# Altium PCB MIXR User Interface.PcbDoc
Units mm, origin at the board's own origin, x right, y up, seen from the top; angles counter-clockwise.
Board outline 109.43 x 61.1 mm, 2 copper layers (Top Layer, Bottom Layer), stack 1.569 mm thick; 16 components, 9 nets, 50 pads, 70 vias.
Unrouted connection lines stored in the file: 103.
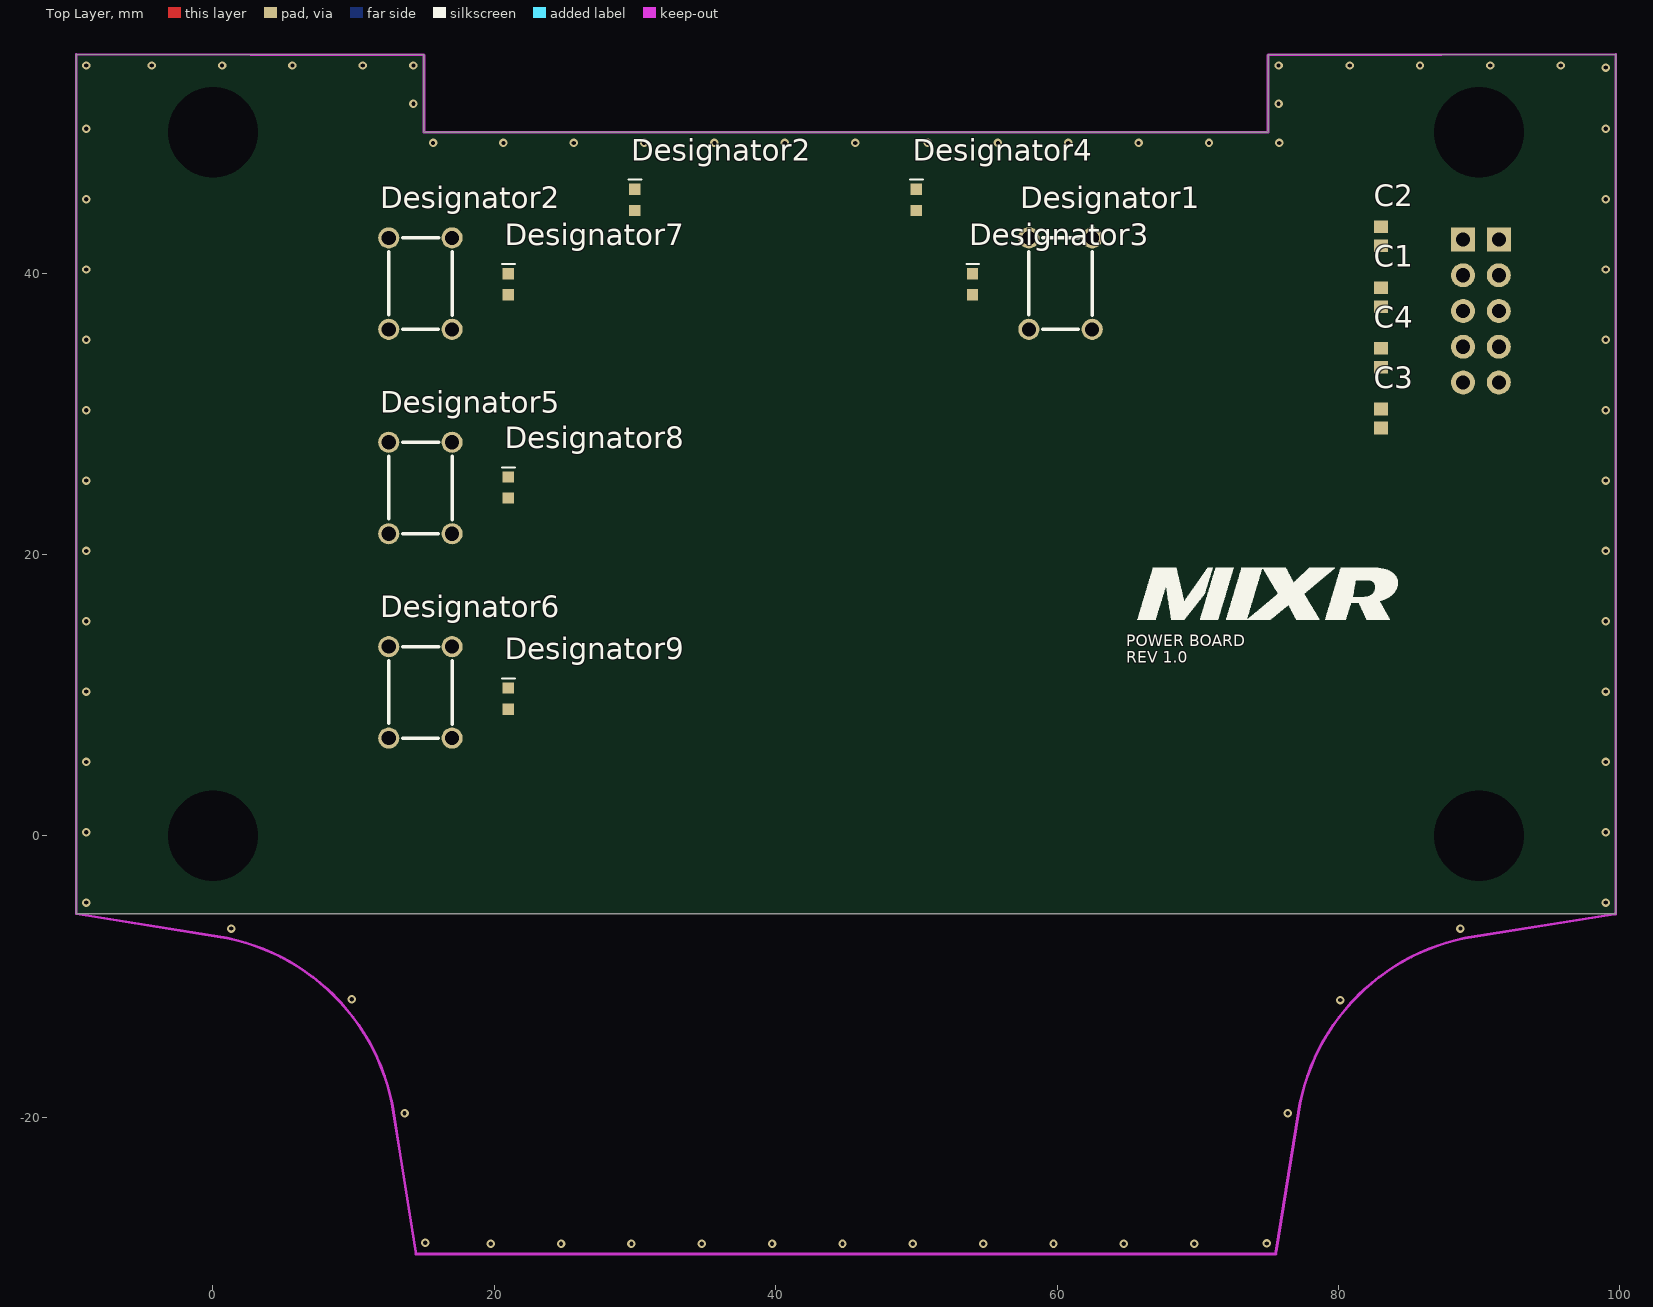
[diagram p0: Top Layer view]
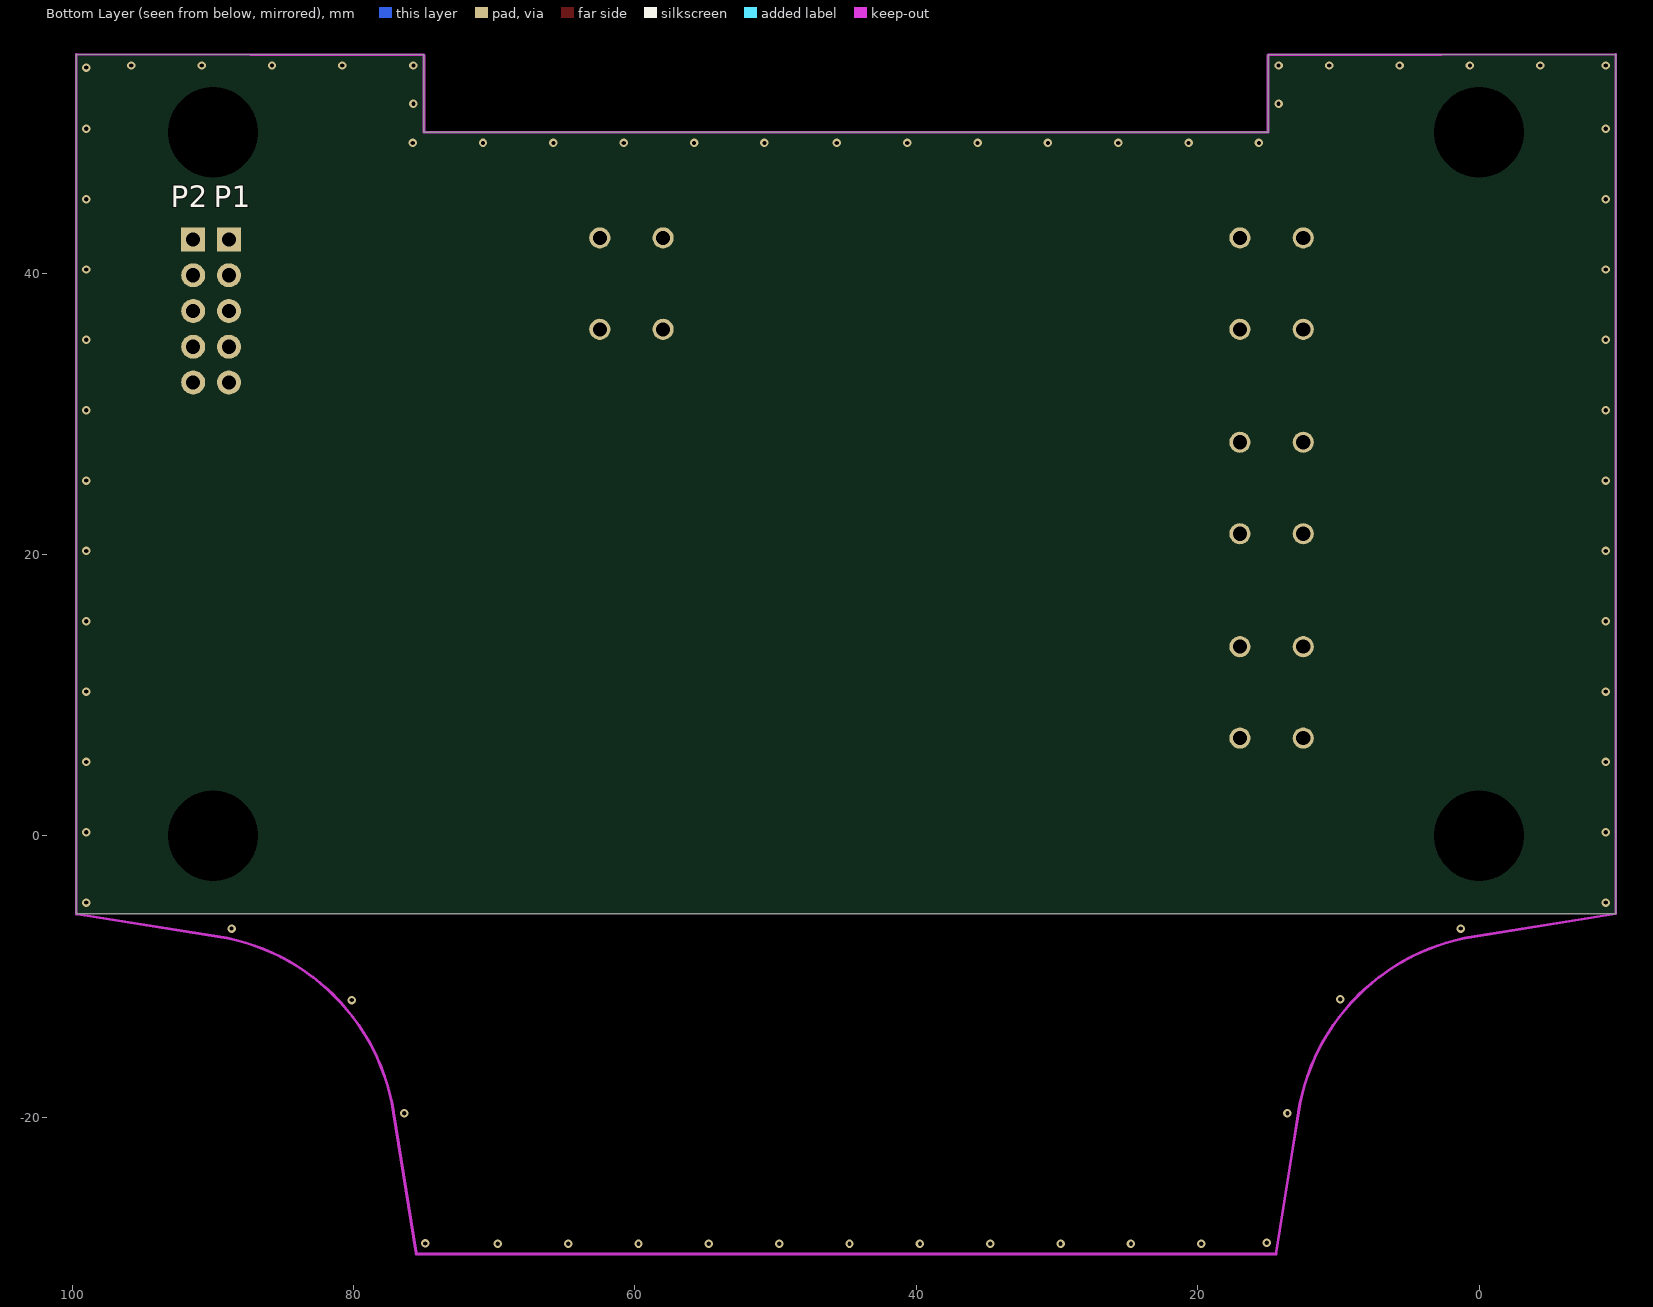
[diagram p1: Bottom Layer view, seen from below]

## Layer stack, top to bottom
Top Solder: solder mask 0.0254, SM-001, Dk 4
Top Layer: signal copper 0.035
Dielectric 1: core 1.4986, Core-043, Dk 4.3
Bottom Layer: signal copper 0.035
Bottom Solder: solder mask 0.0254, SM-001, Dk 4

## Board outline
-9.713,-5.549 -9.713,55.548 15,55.5 15,50 75,50 75,55.504 99.713,55.548 99.713,-5.549

## Design rules (kind name [scope] priority, off if disabled: settings)
BoardOutlineClearance [All] p1: gap=0.406 ignorepadtopadclearanceinfootprint=FALSE
Clearance [All] p1: gap=0.152 ignorepadtopadclearanceinfootprint=TRUE except(0: Arc-Hole Track-Hole SMDPad-Hole THPad-Hole Via-Hole Fill-Hole Poly-Hole Region-Hole Text-Hole)
ComponentClearance ComponentClearance_ControllerBoard [InComponent('P1') vs Identifier = 'Controller_Board'] p1: gap=0 collisioncheckmode=3 verticalgap=0 showdistances=FALSE
ComponentClearance ComponentClearance_Standoffs [Identifier = 'Standoff' vs Identifier = 'Controller_Board'] p2: gap=0 collisioncheckmode=3 verticalgap=0 showdistances=FALSE
ComponentClearance [All] p3: gap=0.254 collisioncheckmode=3 verticalgap=0.254 showdistances=FALSE
DiffPairsRouting USB_90R [All] p1: maxlimit=0.4 minlimit=0.25 mostfreqgap=0.3 toplayer_minwidth=0.2 toplayer_maxwidth=0.35 toplayer_prefwidth=0.25 bottomlayer_minwidth=0.2 bottomlayer_maxwidth=0.35 bottomlayer_prefwidth=0.25 maxuncoupledlength=12.7
Height [All] p1: minheight=0 maxheight=30 prefheight=12.7
HoleSize [All] p1: absolutevalues=TRUE maxlimit=6.3 minlimit=0.3 maxpercent=80.000 minpercent=20.000
MinimumAnnularRing [All] p1: minimumring=0.12
MinimumSolderMaskSliver [All] p1 off: minsoldermaskwidth=0.1
PlaneConnect 0402 [(ObjectKind = 'Component') And ((Footprint = 'CAP 0402') or (Footprint  = 'RES 0402'))] p1: pad.planeconnectstyle=Relief pad.reliefexpansion=0.5 pad.reliefentries=4 pad.reliefconductorwidth=0.2 pad.reliefairgap=0.2 via.planeconnectstyle=Direct via.reliefexpansion=0.508 via.reliefentries=4 via.reliefconductorwidth=0.254 via.reliefairgap=0.254
PlaneConnect [All] p2: planeconnectstyle=Relief reliefexpansion=0.508 reliefentries=4 reliefconductorwidth=0.254 reliefairgap=0.254
PolygonConnect [(ObjectKind = 'Component') And ((Footprint = 'CAP 0402') or (Footprint  = 'RES 0402'))] p1: connectstyle=Relief reliefconductorwidth=0.254 reliefentries=4 polygonreliefangle="90 Angle" airgapwidth=0.254
PolygonConnect PolygonConnect_NoThermal [All] p2: connectstyle=Direct reliefconductorwidth=0.254 reliefentries=4 polygonreliefangle="90 Angle" airgapwidth=0.254
RoutingVias [All] p1: holewidth=0.3 width=0.6 viastyle="Through Hole" minholewidth=0.3 minwidth=0.6 maxholewidth=0.711 maxwidth=1.27
SilkToSolderMaskClearance [IsPad] p1: minsilkscreentomaskgap=0.178 clearancetoexposedcopper=TRUE
SolderMaskExpansion [All] p1: expansion=0.102 istentingtop=FALSE
Width [All] p1: maxlimit=2.54 minlimit=0.154 preferedwidth=0.2
23 further rules are at their usual default settings.

## Classes and differential pairs
component class "MIXR UI - Connectors": C1 C2 C3 C4 P1 P2

## Components (designator, comment, footprint, x,y, rotation, side; value= is the part's Value field where it differs from the comment)
C1 "CAP CER 10nF 50V 5% X7R 0603" "CAP, 0603" 83.023,38.283 r90 top
C2 "CAP CER 10nF 50V 5% X7R 0603" "CAP, 0603" 83.023,42.609 r90 top
C3 "CAP CER 10nF 50V 5% X7R 0603" "CAP, 0603" 83.023,29.658 r90 top
C4 "CAP CER 10nF 50V 5% X7R 0603" "CAP, 0603" 83.023,33.983 r90 top
Designator1 "Comment" "SW SPST-NO 6x6mm Via Hole" 58,36 r0 top
Designator2 "Comment" LED_0603 30,44.5 r90 top
Designator2 "Comment" "SW SPST-NO 6x6mm Via Hole" 12.5,36 r0 top
Designator3 "Comment" LED_0603 54.01,38.5 r90 top
Designator4 "Comment" LED_0603 50,44.5 r90 top
Designator5 "Comment" "SW SPST-NO 6x6mm Via Hole" 12.5,21.469 r0 top
Designator6 "Comment" "SW SPST-NO 6x6mm Via Hole" 12.5,6.938 r0 top
Designator7 "Comment" LED_0603 21,38.5 r90 top
Designator8 "Comment" LED_0603 21.01,24.05 r90 top
Designator9 "Comment" LED_0603 21.01,9.05 r90 top
P1 "0.1\"" "CONN, 5POS 0.3\" 0.100\" FEMALE HEADER" 88.86,42.38 r270 bottom locked
P2 "0.1\"" "CONN, 5POS 0.3\" 0.100\" FEMALE HEADER" 91.4,42.38 r270 bottom locked

## Footprints (in the part's own frame and the unit in brackets; to place one, negate y for a bottom-side part, rotate by r counter-clockwise, add the part's x,y. Pads: shape width x height; smd on the part's side, far side on the other; paste and mask are expansions set on the pad)
"CAP, 0603" [mm] "Chip Capacitor, 2-Leads, Body 1.60x0.81mm, IPC Medium Density"
  rect 0.9x1 smd mask+0.076: 1(-0.675,0) 2(0.675,0)
  body extent -0.87,-0.48 0.87,0.48, height 0.9
"CONN, 5POS 0.3\" 0.100\" FEMALE HEADER" [mm]
  rect 1.7x1.7 hole 1: 1(0,0)
  round 1.7 hole 1: 2(2.54,0) 3(5.08,0) 4(7.62,0) 5(10.16,0)
  body extent -1.52,-1.21 11.68,1.21, height 8.51
LED_0603 [mm]
  rect 0.8x0.8 smd: 1(-0.05,0.01) 2(1.45,0.01)
  silkscreen extent 2.13,-0.46 2.13,0.45, body extent -0.09,-0.39 1.51,0.41, height 0.8
"SW SPST-NO 6x6mm Via Hole" [mm]
  round 1.5 hole 1: 1(0,0) 1(0,6.5) 2(4.5,0) 2(4.5,6.5)
  silkscreen extent 0,0 4.5,6.5, body extent -0.75,-0.7 5.25,7.2, height 9.51

## Part data
C1 C2 C3 C4: "10000pF ±5% 50V Ceramic Capacitor U2J 0603 (1608 Metric)", Capacitance=10000pF, Manufacturer 1=KEMET, Manufacturer Part Number 1=C0603C103J5JAC7867, Operating Temperature="-55°C ~ 125°C", Package / Case="0603 (1608 Metric)", Ratings=-, Supplier Part Number 1=399-13384-1-ND, Temperature Coefficient=U2J, Tolerance=±5%, Voltage=50V, ComponentLink1Description=http://www.kemet.com/docfinder?Partnumber=C0603C103J5JAC7867, ComponentLink1URL=http://www.kemet.com/docfinder?Partnumber=C0603C103J5JAC7867, Failure Rate=-, Height - Seated (Max)=-, Lead Spacing=-, Lead Style=-, Mounting Type="Surface Mount, MLCC", Packaging="Cut Tape (CT)", Part Status=Active, Size / Dimension="0.063\" L x 0.032\" W (1.60mm x 0.80mm)", Supplier 1=Digi-Key, Thickness (Max)="0.034\" (0.87mm)"
P1 P2: library part "CONN 5POS 0.1\" 0.3\" FEMALE HEADER", "5 Position Receptacle Connector Through Hole", Color=Black, Contact Resistance=10mR, Manufacturer=Samtec, Manufacturer Part Number=SSW-105-01-T-S, Max Current Rating=6.9A, Max Operating Temperature=105°C, Max Voltage Rating (AC)=550V, Min Operating Temperature=-55°C, Supplier Part Number 1=SAM1213-05-ND, Category="Headers and Wire Housings", ComponentLink1Description=https://datasheet.ciiva.com/750/ssw-1xx-xx-xxx-x-xx-xxx-xx-mkt-750073.pdf?src-supplier=Digi-Key, ComponentLink1URL=https://datasheet.ciiva.com/750/ssw-1xx-xx-xxx-x-xx-xxx-xx-mkt-750073.pdf?src-supplier=Digi-Key, Connector Type=Receptacle,Socket, Contact Material=Bronze, Contact Plating=Tin,Matte, Depth=2.41mm, Gender=Receptacle, Housing Color=Black, Housing Material=Polymer, Lead Free="Lead Free", Length=13.21mm, Mating Cycles=100, Mount="Through Hole", Number of Contacts=5, Number of Positions=5, Number of Rows=1, Orientation=Vertical, Packaging=Bulk, Pitch=2.54mm, Pricing 1="1=0.55000, 10=0.51100, 25=0.46000, 50=0.40900, 100=0.39190, 250=0.35784, 500=0.34080 (USD)", Radiation Hardening=No, REACH SVHC="No SVHC", RoHS=Yes, Stock 1=1361, Supplier 1=Digi-Key, Termination=Solder, Width=2.41mm

## Free pads (board coordinates)
  round 0 hole 6.414: 7(0,0) 7(0,50) 7(90,0) 7(90,50)

## Via types
v1: diameter 0.6, hole 0.3, Top Layer to Bottom Layer, 70 vias

## Nets (pads, with @x,y where several pads share a name; then routed paths per layer and width w, separated by ;. In a path a pad name is that pad's centre, name@x,y a point inside that pad or via, vN(x,y) a via of type N, cw(c..) or ccw(c..) an arc to the next point about the centre after c; other vN are vias at no path point)
3V3: P1.1
3V3_SW: P1.2
ESP32_IO18_INTERFACE_I2C_PE_INT: C1.1 P2.3
ESP32_IO19_I2C2_SDA: P2.2
ESP32_IO23_I2C2_SCL: P2.1
ESP32_IO36_POWER_BUTTON: C2.1 P2.4
GND: C1.2 C2.2 C3.2 C4.2 P1.5 P2.5
  other v1: 19.75,-29 24.75,-29 29.75,-29 34.75,-29 39.75,-29 44.75,-29 49.75,-29 54.75,-29 59.75,-29 64.75,-29 69.75,-29 74.9,-28.975 15.1,-28.925 13.625,-19.725 76.4,-19.725 80.125,-11.675 9.875,-11.625 1.3,-6.6 88.675,-6.6 -9,-4.75 99,-4.75 -9,0.25 99,0.25 -9,5.25 99,5.25 -9,10.25 99,10.25 -9,15.25 99,15.25 -9,20.25 99,20.25 -9,25.25 99,25.25 -9,30.25 99,30.25 -9,35.25 99,35.25 -9,40.25 99,40.25 -9,45.25 99,45.25 -9,50.25 99,50.25 99,54.6 -9,54.75
INST_0_CLIPPING: C3.1 P1.3
INST_1/MIC_CLIPPING: C4.1 P1.4
pads on no net: Designator1.1 Designator1.2 Designator2.1 Designator2.2 Designator3.1 Designator3.2 Designator4.1 Designator4.2 Designator5.1 Designator5.2 Designator6.1 Designator6.2 Designator7.1 Designator7.2 Designator8.1 Designator8.2 Designator9.1 Designator9.2
copper on no net:
  other v1: 15.65,49.25 20.65,49.25 25.65,49.25 30.65,49.25 35.65,49.25 40.65,49.25 45.65,49.25 50.8,49.25 55.8,49.25 60.8,49.25 65.8,49.25 70.8,49.25 75.8,49.25 14.25,52.038 75.75,52.038 -4.35,54.75 0.65,54.75 5.65,54.75 10.65,54.75 14.25,54.75 75.75,54.75 80.8,54.75 85.8,54.75 90.8,54.75 95.8,54.75

## Keep-outs
Keep-Out Layer:
  lines w0.2: 14.42,-29.719 75.568,-29.719 ; 14.42,-29.594 13.324,-22.672 12.847,-19.663 ccw(c-2.016,-22.017) 0.338,-7.154 -9.713,-5.549 -9.713,55.55 15,55.5 15,50 75,50 75,55.5 99.713,55.55 99.713,-5.499 ; 75.568,-29.594 77.153,-19.663 cw(c92.016,-22.017) 89.662,-7.154 99.594,-5.581 99.595,-5.58 99.596,-5.58 99.598,-5.58 99.599,-5.58 99.6,-5.58 99.601,-5.579 99.602,-5.579 99.604,-5.579 99.605,-5.579 99.606,-5.579 99.607,-5.578 99.609,-5.578 ; 99.713,-5.549 99.712,-5.549 99.711,-5.55 99.71,-5.55 99.709,-5.55 99.708,-5.551 99.706,-5.551 99.705,-5.552 99.704,-5.552 99.703,-5.553 99.702,-5.553 99.701,-5.553 99.699,-5.554 99.698,-5.554 99.697,-5.555 99.696,-5.555 99.695,-5.555 99.694,-5.556 ; 99.61,-5.578 99.611,-5.578 99.612,-5.577 99.613,-5.577 99.615,-5.577 99.616,-5.577 99.617,-5.576 99.618,-5.576 99.62,-5.576 99.621,-5.576 99.622,-5.575 99.623,-5.575 99.624,-5.575 99.626,-5.575 99.627,-5.574 99.628,-5.574 99.629,-5.574 99.63,-5.574 99.632,-5.573 99.633,-5.573 99.634,-5.573 99.635,-5.573 99.636,-5.572 99.638,-5.572 99.639,-5.572 99.64,-5.571 99.641,-5.571 99.642,-5.571 99.644,-5.57 99.645,-5.57 99.646,-5.57 99.647,-5.57 99.648,-5.569 99.65,-5.569 99.651,-5.569 99.652,-5.568 99.653,-5.568 99.654,-5.568 99.656,-5.567 99.657,-5.567 99.658,-5.567 ; 99.609,-5.578 99.61,-5.578 ; 99.659,-5.566 99.66,-5.566 99.662,-5.566 99.663,-5.565 99.664,-5.565 99.665,-5.565 99.666,-5.564 99.668,-5.564 99.669,-5.564 99.67,-5.563 99.671,-5.563 99.672,-5.563 99.674,-5.562 99.675,-5.562 99.676,-5.562 ; 99.658,-5.567 99.659,-5.566 ; 99.677,-5.561 99.678,-5.561 99.679,-5.56 99.681,-5.56 99.682,-5.56 99.683,-5.559 99.684,-5.559 99.685,-5.559 99.687,-5.558 99.688,-5.558 99.689,-5.557 99.69,-5.557 99.691,-5.557 99.692,-5.556 ; 99.676,-5.562 99.677,-5.561 ; 99.692,-5.556 99.694,-5.556

## Silkscreen, mask and mechanical layers (free items; w line width, h text height)
Top Overlay:
  drawing of 5 lines, arcs and shapes, not listed
  text "POWER BOARD / REV 1.0" at 64.929,12.288 h0.8
Top Solder:
  lines w1.25: 1.263,-6.793 -9.2,-5.122 -9.2,54.825 14.25,54.825 14.25,49.25 75.75,49.25 75.75,54.825 99.2,54.825 99.2,-5.122 88.737,-6.793 ; 1.598,-6.889 cw(c-1.856,-21.883) 13.375,-19.701 ; 13.412,-19.695 14.918,-29.201 ; 14.884,-29.2 73.513,-29.2 75.025,-29.2 ; 75.082,-29.201 76.588,-19.695 ; 76.625,-19.701 cw(c91.856,-21.883) 88.402,-6.889
Bottom Solder:
  lines w1.25: 1.263,-6.793 -9.2,-5.122 -9.2,54.825 14.25,54.825 14.25,49.25 75.75,49.25 75.75,54.825 99.2,54.825 99.2,-5.122 88.737,-6.793 ; 1.598,-6.889 cw(c-1.856,-21.883) 13.375,-19.701 ; 13.412,-19.695 14.918,-29.201 ; 14.884,-29.2 73.513,-29.2 75.025,-29.2 ; 75.082,-29.201 76.588,-19.695 ; 76.625,-19.701 cw(c91.856,-21.883) 88.402,-6.889
Mechanical 7:
  lines w0.1: 15,55.5 -9.713,55.548 -9.713,-5.549 99.713,-5.549 99.713,55.548 75,55.504 75,50 15,50 15,55.504